# EAGLE board sequencer-eurocard (EAGLE 5.11)
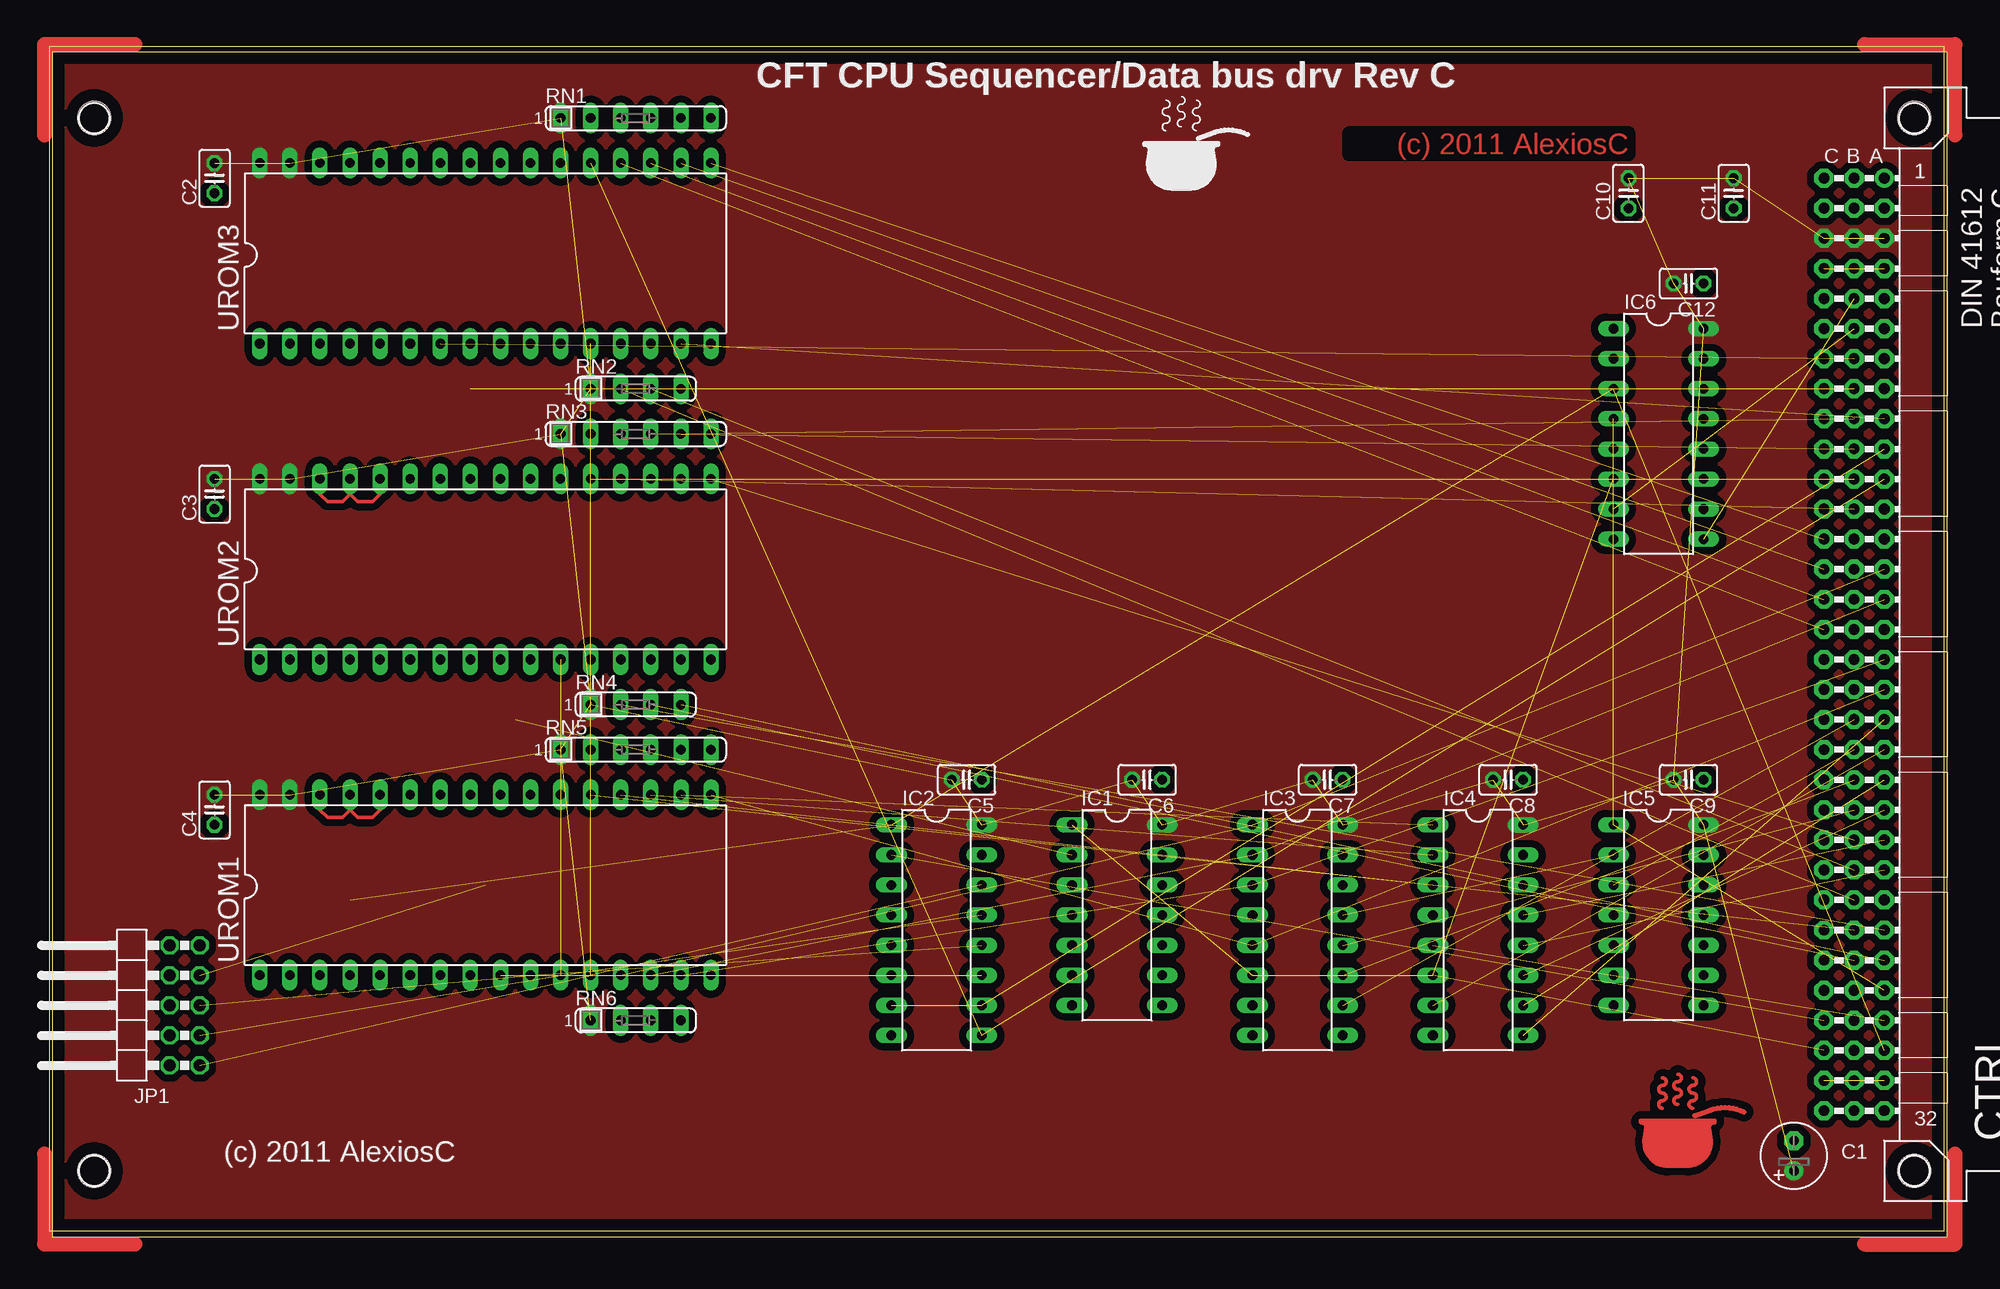
[diagram p0: board, top side]
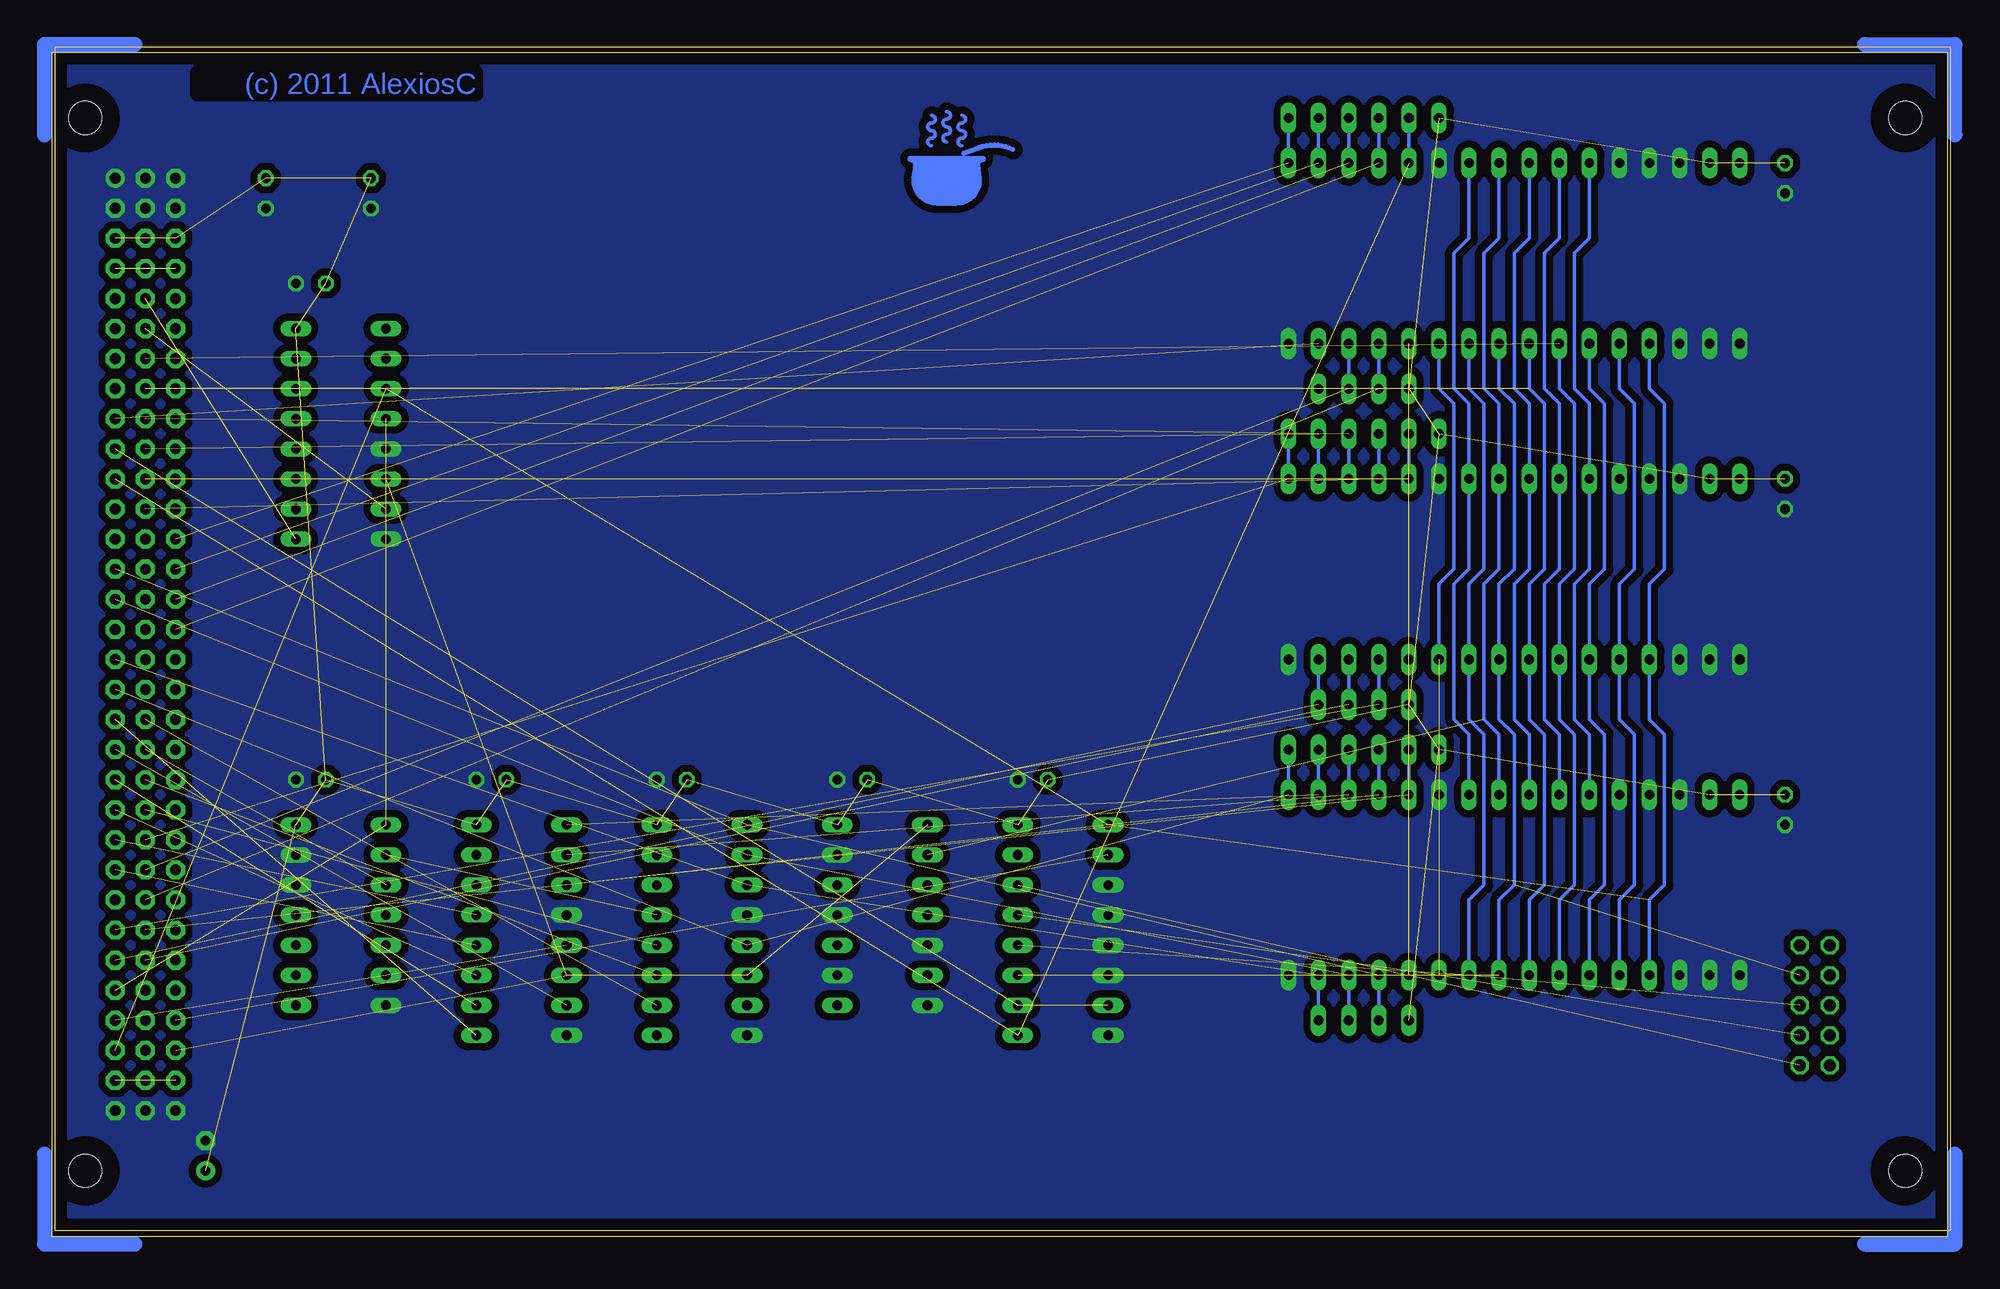
[diagram p1: board, bottom side, seen from below]

Size 160 x 100 mm. Coordinates in mm from the lower left corner, seen from the top.
Outline: 0,0 160,0 160,100 0,100 0,0
Copper layers (1*16): Top 0.035mm / dielectric 1.5mm / Bottom 0.035mm
Design rules "olimex-10mil": minimum track width 10mil, minimum drill 24mil, track to track 10mil, track to pad 10mil, pad to pad 10mil, via to via 10mil, smd to smd 10mil, copper to edge 40mil, drill to drill 10mil, minimum pad ring 10mil, minimum via ring 8mil, stop-mask expansion 0mil, vias tented up to drill 0mil, thermal gap 10mil
Net classes: 1 Power: width 0.914 mm, clearance 0.61 mm; 2 12V: width 1.016 mm, clearance 1.016 mm

## Footprints (pad centres in the part's own frame; a part is rotated, then mirrored left to right if it is on the bottom)
E2,5-6 = drill 0.813 pad 1.6 round: + -1.27,0 | drill 0.813 pad 1.6 octagon: - 1.27,0
C025-025X050 = drill 0.813 octagon: 1 -1.27,0; 2 1.27,0
VG96B = drill 0.914 pad 1.6 round: A1 154.94,39.37 | drill 0.914 pad 1.6 octagon: A2 154.94,36.83; A3 154.94,34.29; A4 154.94,31.75; A5 154.94,29.21; A6 154.94,26.67; A7 154.94,24.13; A8 154.94,21.59; A9 154.94,19.05; A10 154.94,16.51; A11 154.94,13.97; A12 154.94,11.43; A13 154.94,8.89; A14 154.94,6.35; A15 154.94,3.81; A16 154.94,1.27; A17 154.94,-1.27; A18 154.94,-3.81; A19 154.94,-6.35; A20 154.94,-8.89; A21 154.94,-11.43; A22 154.94,-13.97; A23 154.94,-16.51; A24 154.94,-19.05; A25 154.94,-21.59; A26 154.94,-24.13; A27 154.94,-26.67; A28 154.94,-29.21; A29 154.94,-31.75; A30 154.94,-34.29; A31 154.94,-36.83; A32 154.94,-39.37; B1 152.4,39.37; B2 152.4,36.83; B3 152.4,34.29; B4 152.4,31.75; B5 152.4,29.21; B6 152.4,26.67; B7 152.4,24.13; B8 152.4,21.59; B9 152.4,19.05; B10 152.4,16.51; B11 152.4,13.97; B12 152.4,11.43; B13 152.4,8.89; B14 152.4,6.35; B15 152.4,3.81; B16 152.4,1.27; B17 152.4,-1.27; B18 152.4,-3.81; B19 152.4,-6.35; B20 152.4,-8.89; B21 152.4,-11.43; B22 152.4,-13.97; B23 152.4,-16.51; B24 152.4,-19.05; B25 152.4,-21.59; B26 152.4,-24.13; B27 152.4,-26.67; B28 152.4,-29.21; B29 152.4,-31.75; B30 152.4,-34.29; B31 152.4,-36.83; B32 152.4,-39.37; C1 149.86,39.37; C2 149.86,36.83; C3 149.86,34.29; C4 149.86,31.75; C5 149.86,29.21; C6 149.86,26.67; C7 149.86,24.13; C8 149.86,21.59; C9 149.86,19.05; C10 149.86,16.51; C11 149.86,13.97; C12 149.86,11.43; C13 149.86,8.89; C14 149.86,6.35; C15 149.86,3.81; C16 149.86,1.27; C17 149.86,-1.27; C18 149.86,-3.81; C19 149.86,-6.35; C20 149.86,-8.89; C21 149.86,-11.43; C22 149.86,-13.97; C23 149.86,-16.51; C24 149.86,-19.05; C25 149.86,-21.59; C26 149.86,-24.13; C27 149.86,-26.67; C28 149.86,-29.21; C29 149.86,-31.75; C30 149.86,-34.29; C31 149.86,-36.83; C32 149.86,-39.37 | hole 2.794: 157.48,44.45; 157.48,-44.45; 3.81,44.45; 3.81,-44.45
DIL14 = drill 0.813 long: 1 -7.62,-3.81; 2 -5.08,-3.81; 3 -2.54,-3.81; 4 0,-3.81; 5 2.54,-3.81; 6 5.08,-3.81; 7 7.62,-3.81; 8 7.62,3.81; 9 5.08,3.81; 10 2.54,3.81; 11 0,3.81; 12 -2.54,3.81; 13 -5.08,3.81; 14 -7.62,3.81
DIL16 = drill 0.813 long: 1 -8.89,-3.81; 2 -6.35,-3.81; 3 -3.81,-3.81; 4 -1.27,-3.81; 5 1.27,-3.81; 6 3.81,-3.81; 7 6.35,-3.81; 8 8.89,-3.81; 9 8.89,3.81; 10 6.35,3.81; 11 3.81,3.81; 12 1.27,3.81; 13 -1.27,3.81; 14 -3.81,3.81; 15 -6.35,3.81; 16 -8.89,3.81
2X05/90 = drill 1.016 octagon: 1 -5.08,-6.35; 2 -5.08,-3.81; 3 -2.54,-6.35; 4 -2.54,-3.81; 5 0,-6.35; 6 0,-3.81; 7 2.54,-6.35; 8 2.54,-3.81; 9 5.08,-6.35; 10 5.08,-3.81
SIL6 = drill 0.813 long: 1 -6.35,0; 2 -3.81,0; 3 -1.27,0; 4 1.27,0; 5 3.81,0; 6 6.35,0
SIL4 = drill 0.813 long: 1 -3.81,0; 2 -1.27,0; 3 1.27,0; 4 3.81,0
DIL32 = drill 0.813 long: 1 -19.05,-7.62; 2 -16.51,-7.62; 3 -13.97,-7.62; 4 -11.43,-7.62; 5 -8.89,-7.62; 6 -6.35,-7.62; 7 -3.81,-7.62; 8 -1.27,-7.62; 9 1.27,-7.62; 10 3.81,-7.62; 11 6.35,-7.62; 12 8.89,-7.62; 13 11.43,-7.62; 14 13.97,-7.62; 15 16.51,-7.62; 16 19.05,-7.62 | drill 0.8 long: 17 19.05,7.62; 18 16.51,7.62; 19 13.97,7.62; 20 11.43,7.62; 21 8.89,7.62; 22 6.35,7.62; 23 3.81,7.62; 24 1.27,7.62; 25 -1.27,7.62; 26 -3.81,7.62; 27 -6.35,7.62; 28 -8.89,7.62; 29 -11.43,7.62; 30 -13.97,7.62; 31 -16.51,7.62; 32 -19.05,7.62

## Placement (x,y rotation side)
C1  100uF  [E2,5-6]  147.32,6.35 90 top
C2  1uF  [C025-025X050]  13.97,88.9 90 top
C3  1uF  [C025-025X050]  13.97,62.23 90 top
C4  1uF  [C025-025X050]  13.97,35.56 90 top
C5  0.1uF  [C025-025X050]  77.47,38.1 180 top
C6  0.1uF  [C025-025X050]  92.71,38.1 180 top
C7  0.1uF  [C025-025X050]  107.95,38.1 180 top
C8  0.1uF  [C025-025X050]  123.19,38.1 180 top
C9  0.1uF  [C025-025X050]  138.43,38.1 180 top
C10  0.1uF  [C025-025X050]  133.35,87.63 90 top
C11  0.1uF  [C025-025X050]  142.24,87.63 90 top
C12  0.1uF  [C025-025X050]  138.43,80.01 180 top
CTRL  [VG96B]  0,49.53 0 top
IC1  74HCT04N  [DIL14]  90.17,26.67 270 top
IC2  74ACT161N?  [DIL16]  74.93,25.4 270 top
IC3  74HCT138N  [DIL16]  105.41,25.4 270 top
IC4  74HCT138N  [DIL16]  120.65,25.4 270 top
IC5  74HCT32N  [DIL14]  135.89,26.67 270 top
IC6  74HCT138N  [DIL16]  135.89,67.31 270 top
JP1  [2X05/90]  6.35,19.05 90 top
RN1  2k2  [SIL6]  49.53,93.98 0 top
RN2  2k2  [SIL4]  49.53,71.12 0 top
RN3  2k2  [SIL6]  49.53,67.31 0 top
RN4  2k2  [SIL4]  49.53,44.45 0 top
RN5  2k2  [SIL6]  49.53,40.64 0 top
RN6  2k2  [SIL4]  49.53,17.78 0 top
U$1  SIGNATUREPLANE  [SIGNATURE_PLANE]  134.62,5.08 0 top
U$2  SIGNATUREPLANE  [SIGNATURE_PLANE]  87.63,86.36 0 bottom
U$3  SIGNATURESILK  [SIGNATURE]  92.71,87.63 0 top
UROM1  29F040  [DIL32]  36.83,29.21 0 top
UROM2  29F040  [DIL32]  36.83,55.88 0 top
UROM3  29F040  [DIL32]  36.83,82.55 0 top

## Library data of the parts
C1-C12 = rcl
CTRL = 19inch
IC1 IC3-IC6 = 74xx-eu
IC2 = 41xx
JP1 = pinhead
RN1-RN6 = resistor-sil; OC_FARNELL: unknown; OC_NEWARK: unknown
U$1-U$3 UROM1-UROM3 = alexios

## Nets
*TPA: CTRL.A16
*TPC: CTRL.C17
+12V [12V]: CTRL.A31 CTRL.B31 CTRL.C31
-BOE: CTRL.B5 IC6.9
-CLI: CTRL.B11 RN3.2 UROM2.21
-CLL: CTRL.B9 RN3.4 UROM2.19
-HALT: CTRL.A10 IC2.7 IC2.10
-IEND: CTRL.A11 IC2.9 RN1.2 UROM3.21
-INCA: CTRL.B23 RN3.6 UROM2.17
-INCDR: CTRL.B24 RN2.3 UROM3.14
-INCPC: CTRL.B25 RN2.2 UROM3.13
-INTS: UROM1.25 UROM2.25 UROM3.25
-IO: CTRL.C14 RN1.5 UROM3.18
-IRQ: CTRL.A12
-IRQS: CTRL.A13
-MEM: CTRL.C13 RN1.6 UROM3.17
-R: CTRL.C15 RN1.4 UROM3.19
-R_A: CTRL.B19 IC3.10
-R_AGL: CTRL.B20 IC5.3
-R_DR: CTRL.B21 IC3.11
-R_PC: CTRL.B22 IC3.12
-RESET: CTRL.C30 IC1.1 IC3.6 IC4.6 IC6.6
-RSTHOLD: CTRL.A30 IC2.1 IC6.3 UROM1.4 UROM2.4 UROM3.4
-SKIP: CTRL.B7 UROM1.7 UROM2.7 UROM3.7
-STI: CTRL.B12 RN3.3 UROM2.20
-SYSDEV: CTRL.A25
-UOE: CTRL.B6 IC6.7
-W: CTRL.C16 RN1.3 UROM3.20
-W_A: CTRL.A19 IC4.9
-W_ALU: CTRL.A20 IC4.7
-W_DR: CTRL.A21 IC4.10
-W_IR: CTRL.A22 IC4.11
-W_MAR: CTRL.A23 IC4.13
-W_PC: CTRL.A24 IC4.12
AINDEX: CTRL.B8 UROM1.8 UROM2.8 UROM3.8
ALUOP2: IC6.1
ALUOP3: IC6.2
CLOCK: CTRL.C29 IC2.2
CLOCK2: CTRL.B29
CLOCK3: CTRL.B30
CLOCK4: CTRL.B28
CLOCK14: CTRL.A29 IC4.5
CPL: CTRL.B10 RN3.5 UROM2.18
F_L: CTRL.C18
F_NEG: CTRL.C20
F_ZERO: CTRL.C19
GND [Power]: C1.- C2.1 C3.1 C4.1 C5.1 C6.1 C7.1 C8.1 C9.1 C10.1 C11.1 C12.1 CTRL.A1 CTRL.A2 CTRL.A32 CTRL.B1 CTRL.B2 CTRL.B32 CTRL.C1 CTRL.C2 CTRL.C32 IC1.5 IC1.7 IC1.9 IC1.11 IC1.13 IC2.3 IC2.4 IC2.5 IC2.6 IC2.8 IC3.4 IC3.8 IC4.4 IC4.8 IC5.7 IC5.12 IC5.13 IC6.5 IC6.8 UROM1.1 UROM1.2 UROM1.3 UROM1.16 UROM1.22 UROM1.28 UROM1.29 UROM1.30 UROM2.1 UROM2.2 UROM2.3 UROM2.16 UROM2.22 UROM2.28 UROM2.29 UROM2.30 UROM3.1 UROM3.2 UROM3.3 UROM3.16 UROM3.22 UROM3.28 UROM3.29 UROM3.30
GUARDPULSE: CTRL.A28 IC5.1 IC6.4
IBUS0: CTRL.C5
IBUS1: CTRL.C6
IBUS2: CTRL.C7
IBUS3: CTRL.C8
IBUS4: CTRL.C9
IBUS5: CTRL.C10
IBUS6: CTRL.C11
IBUS7: CTRL.C12
IBUS8: CTRL.C21
IBUS9: CTRL.C22
IBUS10: CTRL.C23
IBUS11: CTRL.C24
IBUS12: CTRL.C25
IBUS13: CTRL.C26
IBUS14: CTRL.C27
IBUS15: CTRL.C28
IR11: UROM1.6 UROM2.6 UROM3.6
IR12: UROM1.5 UROM2.5 UROM3.5
IR13: UROM1.27 UROM2.27 UROM3.27
IR14: UROM1.26 UROM2.26 UROM3.26
IR15: UROM1.23 UROM2.23 UROM3.23
IS_ROLL: CTRL.B18
N$1: IC1.2 UROM1.24 UROM2.24 UROM3.24
N$2: CTRL.A5
N$3: IC3.13 IC5.2
N$4: CTRL.B13
N$5: CTRL.B14
N$6: CTRL.B15
N$7: CTRL.B16
N$8: CTRL.B17
N$49: CTRL.A8
N$50: CTRL.A7
N$51: CTRL.A6
OP_IF0: CTRL.B26 RN5.2 UROM1.21
OP_IF1: CTRL.A26 RN4.2 UROM2.13
OP_IF2: CTRL.B27 RN4.3 UROM2.14
OP_IF3: CTRL.A27 RN4.4 UROM2.15
R_UNIT0: CTRL.A14 IC3.1 RN6.2 UROM1.13
R_UNIT1: CTRL.A15 IC3.2 RN6.3 UROM1.14
R_UNIT2: CTRL.A17 IC3.3 RN6.4 UROM1.15
R_UNIT3: CTRL.A18 IC3.5 RN5.6 UROM1.17
RESERVED_POWER: CTRL.A4 CTRL.B4 CTRL.C4
UINSTR18: CTRL.A9 UROM3.15
UNUSED1: RN2.4
UPC0: IC2.14 JP1.1 UROM1.12 UROM2.12 UROM3.12
UPC1: IC2.13 JP1.3 UROM1.11 UROM2.11 UROM3.11
UPC2: IC2.12 JP1.5 UROM1.10 UROM2.10 UROM3.10
UPC3: IC2.11 JP1.7 UROM1.9 UROM2.9 UROM3.9
VCC [Power]: C1.+ C2.2 C3.2 C4.2 C5.2 C6.2 C7.2 C8.2 C9.2 C10.2 C11.2 C12.2 CTRL.A3 CTRL.B3 CTRL.C3 IC1.14 IC2.16 IC3.16 IC4.16 IC5.14 IC6.16 RN1.1 RN2.1 RN3.1 RN4.1 RN5.1 RN6.1 UROM1.31 UROM1.32 UROM2.31 UROM2.32 UROM3.31 UROM3.32
W_UNIT0: IC4.1 RN5.5 UROM1.18
W_UNIT1: IC4.2 RN5.4 UROM1.19
W_UNIT2: IC4.3 RN5.3 UROM1.20

## Tracks (layer width: path | path; a pad name or v marks a point on that pad's centre or on a via)
+12V  (2 unrouted)
-BOE  (1 unrouted)
-CLI  (1 unrouted)
  Bottom 0.305: UROM2.21 RN3.2
-CLL  (1 unrouted)
  Bottom 0.305: UROM2.19 RN3.4
-HALT  (2 unrouted)
-IEND  (2 unrouted)
  Bottom 0.305: UROM3.21 RN1.2
-INCA  (1 unrouted)
  Bottom 0.305: UROM2.17 RN3.6
-INCDR  (1 unrouted)
  Bottom 0.305: RN2.3 UROM3.14
-INCPC  (1 unrouted)
  Bottom 0.305: RN2.2 UROM3.13
-INTS
  Bottom 0.305: UROM3.25 35.56,83.82 36.83,82.55 36.83,71.12 35.56,69.85 UROM2.25 35.56,55.88 36.83,54.61 36.83,43.18 35.56,41.91 UROM1.25
-IO  (1 unrouted)
  Bottom 0.305: UROM3.18 RN1.5
-MEM  (1 unrouted)
  Bottom 0.305: UROM3.17 RN1.6
-R  (1 unrouted)
  Bottom 0.305: UROM3.19 RN1.4
-R_A  (1 unrouted)
-R_AGL  (1 unrouted)
-R_DR  (1 unrouted)
-R_PC  (1 unrouted)
-RESET  (4 unrouted)
-RSTHOLD  (3 unrouted)
  Bottom 0.305: UROM3.4 25.4,71.12 24.13,69.85 24.13,55.88 25.4,54.61 UROM2.4 25.4,43.18 24.13,41.91 24.13,29.21 25.4,27.94 UROM1.4
-SKIP  (1 unrouted)
  Bottom 0.305: UROM3.7 33.02,71.12 31.75,69.85 31.75,55.88 33.02,54.61 UROM2.7 33.02,43.18 31.75,41.91 31.75,29.21 33.02,27.94 UROM1.7
-STI  (1 unrouted)
  Bottom 0.305: UROM2.20 RN3.3
-UOE  (1 unrouted)
-W  (1 unrouted)
  Bottom 0.305: UROM3.20 RN1.3
-W_A  (1 unrouted)
-W_ALU  (1 unrouted)
-W_DR  (1 unrouted)
-W_IR  (1 unrouted)
-W_MAR  (1 unrouted)
-W_PC  (1 unrouted)
AINDEX  (1 unrouted)
  Bottom 0.305: UROM3.8 35.56,71.12 34.29,69.85 34.29,55.88 35.56,54.61 UROM2.8 35.56,43.18 34.29,41.91 34.29,29.21 35.56,27.94 UROM1.8
CLOCK  (1 unrouted)
CLOCK14  (1 unrouted)
CPL  (1 unrouted)
  Bottom 0.305: UROM2.18 RN3.5
GND
  Top 0.305: UROM1.30 22.86,35.56 23.5,34.92 24.77,34.92 25.4,35.56 | 25.4,35.56 UROM1.29 | 25.4,35.56 26.04,34.92 27.3,34.92 27.94,35.56 UROM1.28 | UROM2.30 22.86,62.23 23.5,61.59 24.77,61.59 25.4,62.23 | 25.4,62.23 UROM2.29 | 25.4,62.23 26.04,61.59 27.3,61.59 27.94,62.23 UROM2.28
  pour Bottom (isolate 0.61, no thermals): 0,100.33 0,0 160.02,0 160.02,100.33
GUARDPULSE  (2 unrouted)
IR11
  Bottom 0.305: UROM3.6 30.48,71.12 29.21,69.85 29.21,55.88 30.48,54.61 UROM2.6 30.48,43.18 29.21,41.91 29.21,29.21 30.48,27.94 UROM1.6
IR12
  Bottom 0.305: UROM3.5 27.94,71.12 26.67,69.85 26.67,55.88 27.94,54.61 UROM2.5 27.94,43.18 26.67,41.91 26.67,29.21 27.94,27.94 UROM1.5
IR13
  Bottom 0.305: UROM3.27 30.48,83.82 31.75,82.55 31.75,71.12 30.48,69.85 UROM2.27 30.48,55.88 31.75,54.61 31.75,43.18 30.48,41.91 UROM1.27
IR14
  Bottom 0.305: UROM3.26 33.02,83.82 34.29,82.55 34.29,71.12 33.02,69.85 UROM2.26 33.02,55.88 34.29,54.61 34.29,43.18 33.02,41.91 UROM1.26
IR15
  Bottom 0.305: UROM3.23 40.64,83.82 41.91,82.55 41.91,71.12 40.64,69.85 UROM2.23 40.64,55.88 41.91,54.61 41.91,43.18 40.64,41.91 UROM1.23
N$1  (1 unrouted)
  Bottom 0.305: UROM3.24 38.1,83.82 39.37,82.55 39.37,71.12 38.1,69.85 UROM2.24 38.1,55.88 39.37,54.61 39.37,43.18 38.1,41.91 UROM1.24
N$3  (1 unrouted)
OP_IF0  (1 unrouted)
  Bottom 0.305: UROM1.21 RN5.2
OP_IF1  (1 unrouted)
  Bottom 0.305: RN4.2 UROM2.13
OP_IF2  (1 unrouted)
  Bottom 0.305: RN4.3 UROM2.14
OP_IF3  (1 unrouted)
  Bottom 0.305: RN4.4 UROM2.15
R_UNIT0  (2 unrouted)
  Bottom 0.305: RN6.2 UROM1.13
R_UNIT1  (2 unrouted)
  Bottom 0.305: RN6.3 UROM1.14
R_UNIT2  (2 unrouted)
  Bottom 0.305: RN6.4 UROM1.15
R_UNIT3  (2 unrouted)
  Bottom 0.305: UROM1.17 RN5.6
RESERVED_POWER  (2 unrouted)
UINSTR18  (1 unrouted)
UPC0  (4 unrouted)
UPC1  (3 unrouted)
  Bottom 0.305: UROM3.11 43.18,71.12 41.91,69.85 41.91,55.88 43.18,54.61 UROM2.11
UPC2  (2 unrouted)
  Bottom 0.305: UROM3.10 40.64,71.12 39.37,69.85 39.37,55.88 40.64,54.61 UROM2.10 40.64,43.18 39.37,41.91 39.37,29.21 40.64,27.94 UROM1.10
UPC3  (2 unrouted)
  Bottom 0.305: UROM3.9 38.1,71.12 36.83,69.85 36.83,55.88 38.1,54.61 UROM2.9 38.1,43.18 36.83,41.91 36.83,29.21 38.1,27.94 UROM1.9
VCC  (32 unrouted)
  pour Top (isolate 0.61, rank 2, no thermals): 0,100.33 0,0 160.02,0 160.02,100.33
W_UNIT0  (1 unrouted)
  Bottom 0.305: UROM1.18 RN5.5
W_UNIT1  (1 unrouted)
  Bottom 0.305: UROM1.19 RN5.4
W_UNIT2  (1 unrouted)
  Bottom 0.305: UROM1.20 RN5.3

## Text on the board
Top: (c) 2011 AlexiosC
Bottom: (c) 2011 AlexiosC
tNames: CFT CPU Sequencer/Data bus drv Rev C | (c) 2011 AlexiosC